# Altium PCB PCBDraft1Stella.PcbDoc
Units mm, origin at the board's own origin, x right, y up, seen from the top; angles counter-clockwise.
Board outline 80.14 x 80.39 mm, 2 copper layers (Top Layer, Bottom Layer); 24 components, 23 nets, 136 pads, 0 vias.
Unrouted connection lines stored in the file: 62.
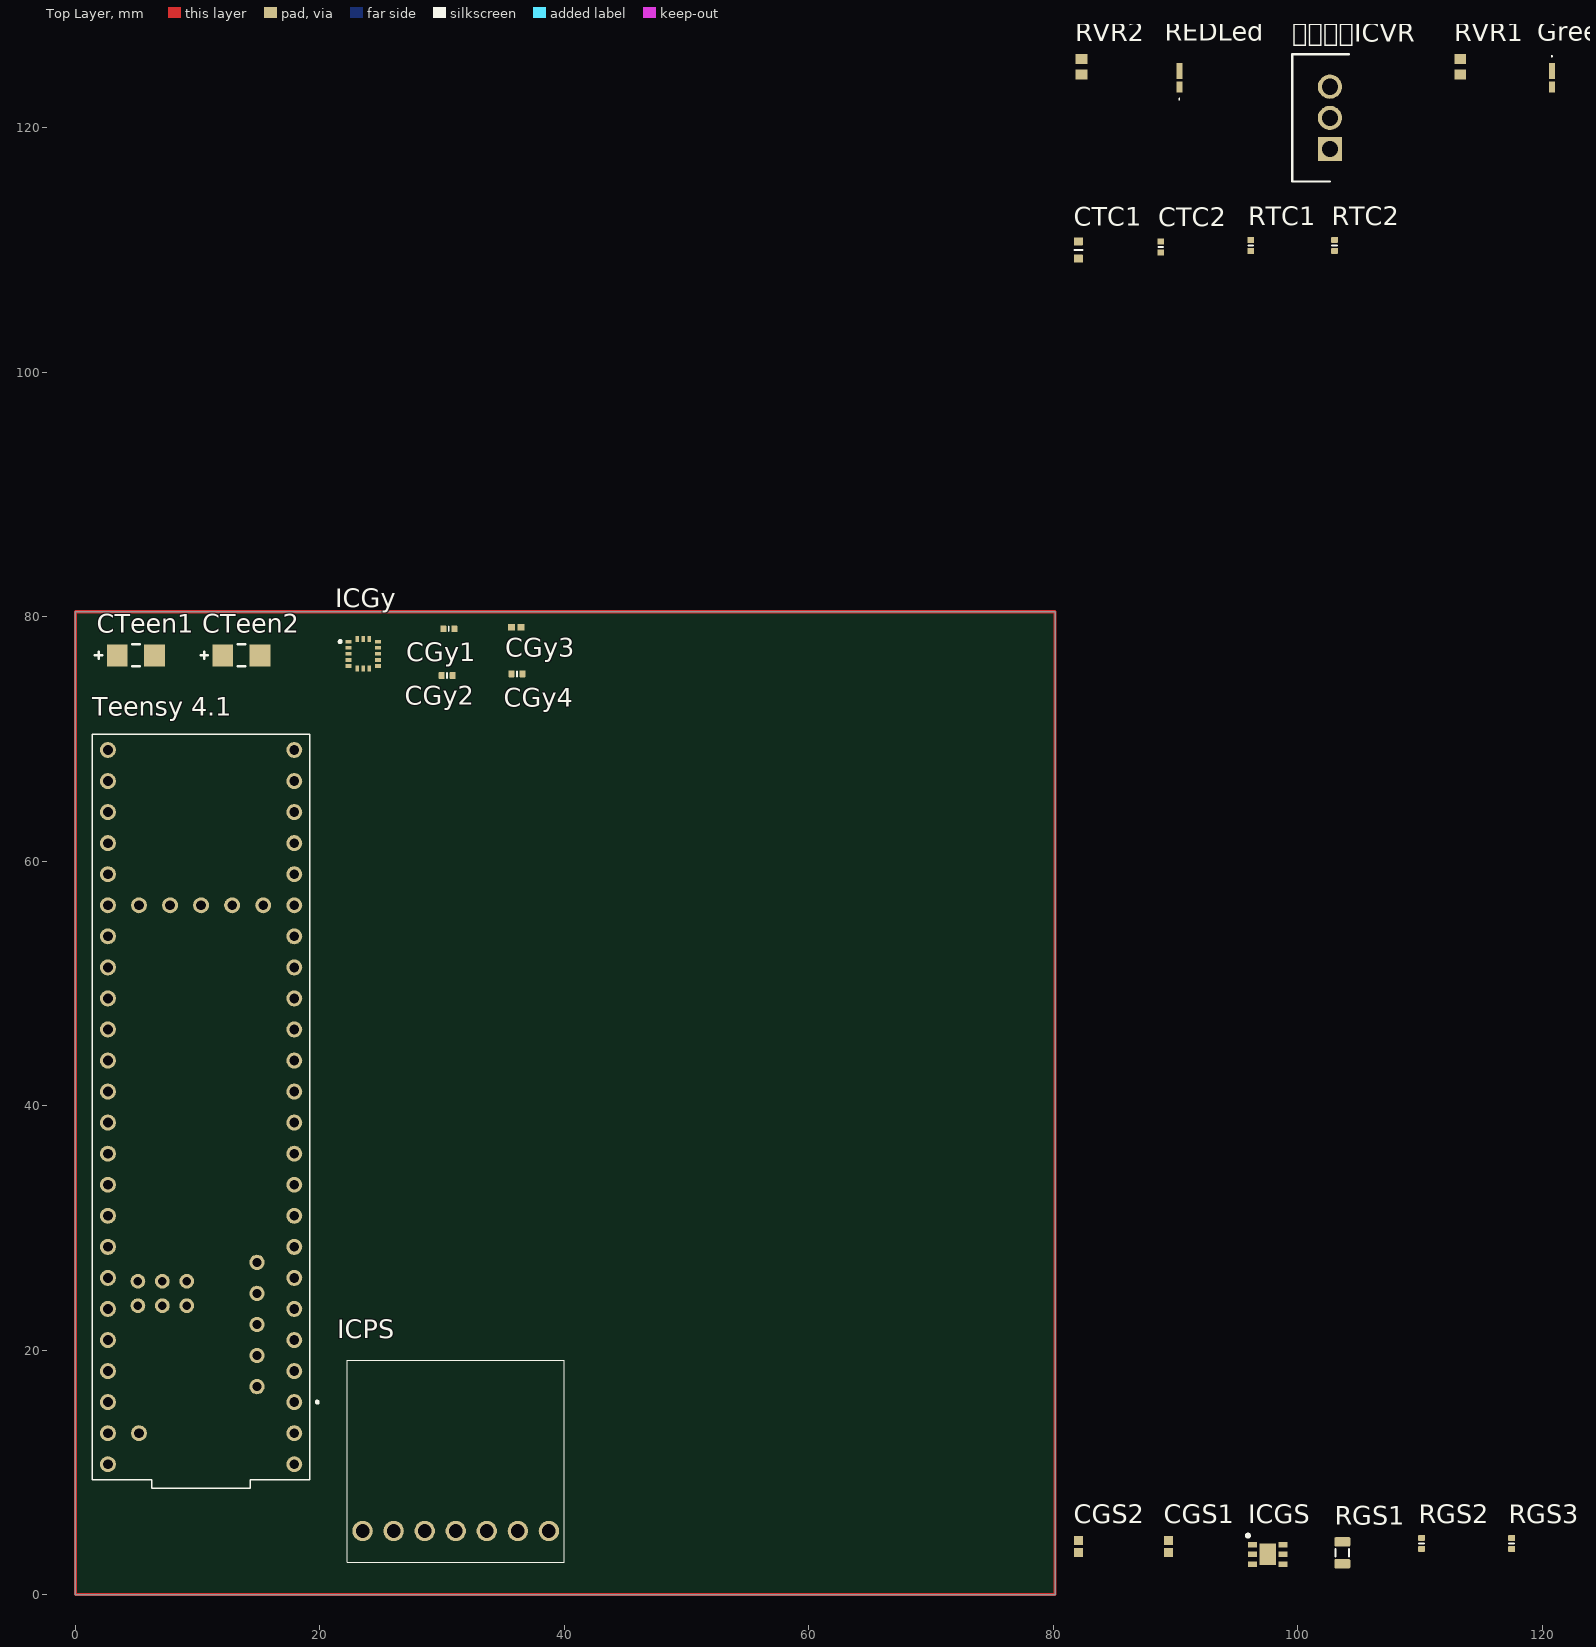
[diagram p0: Top Layer view]
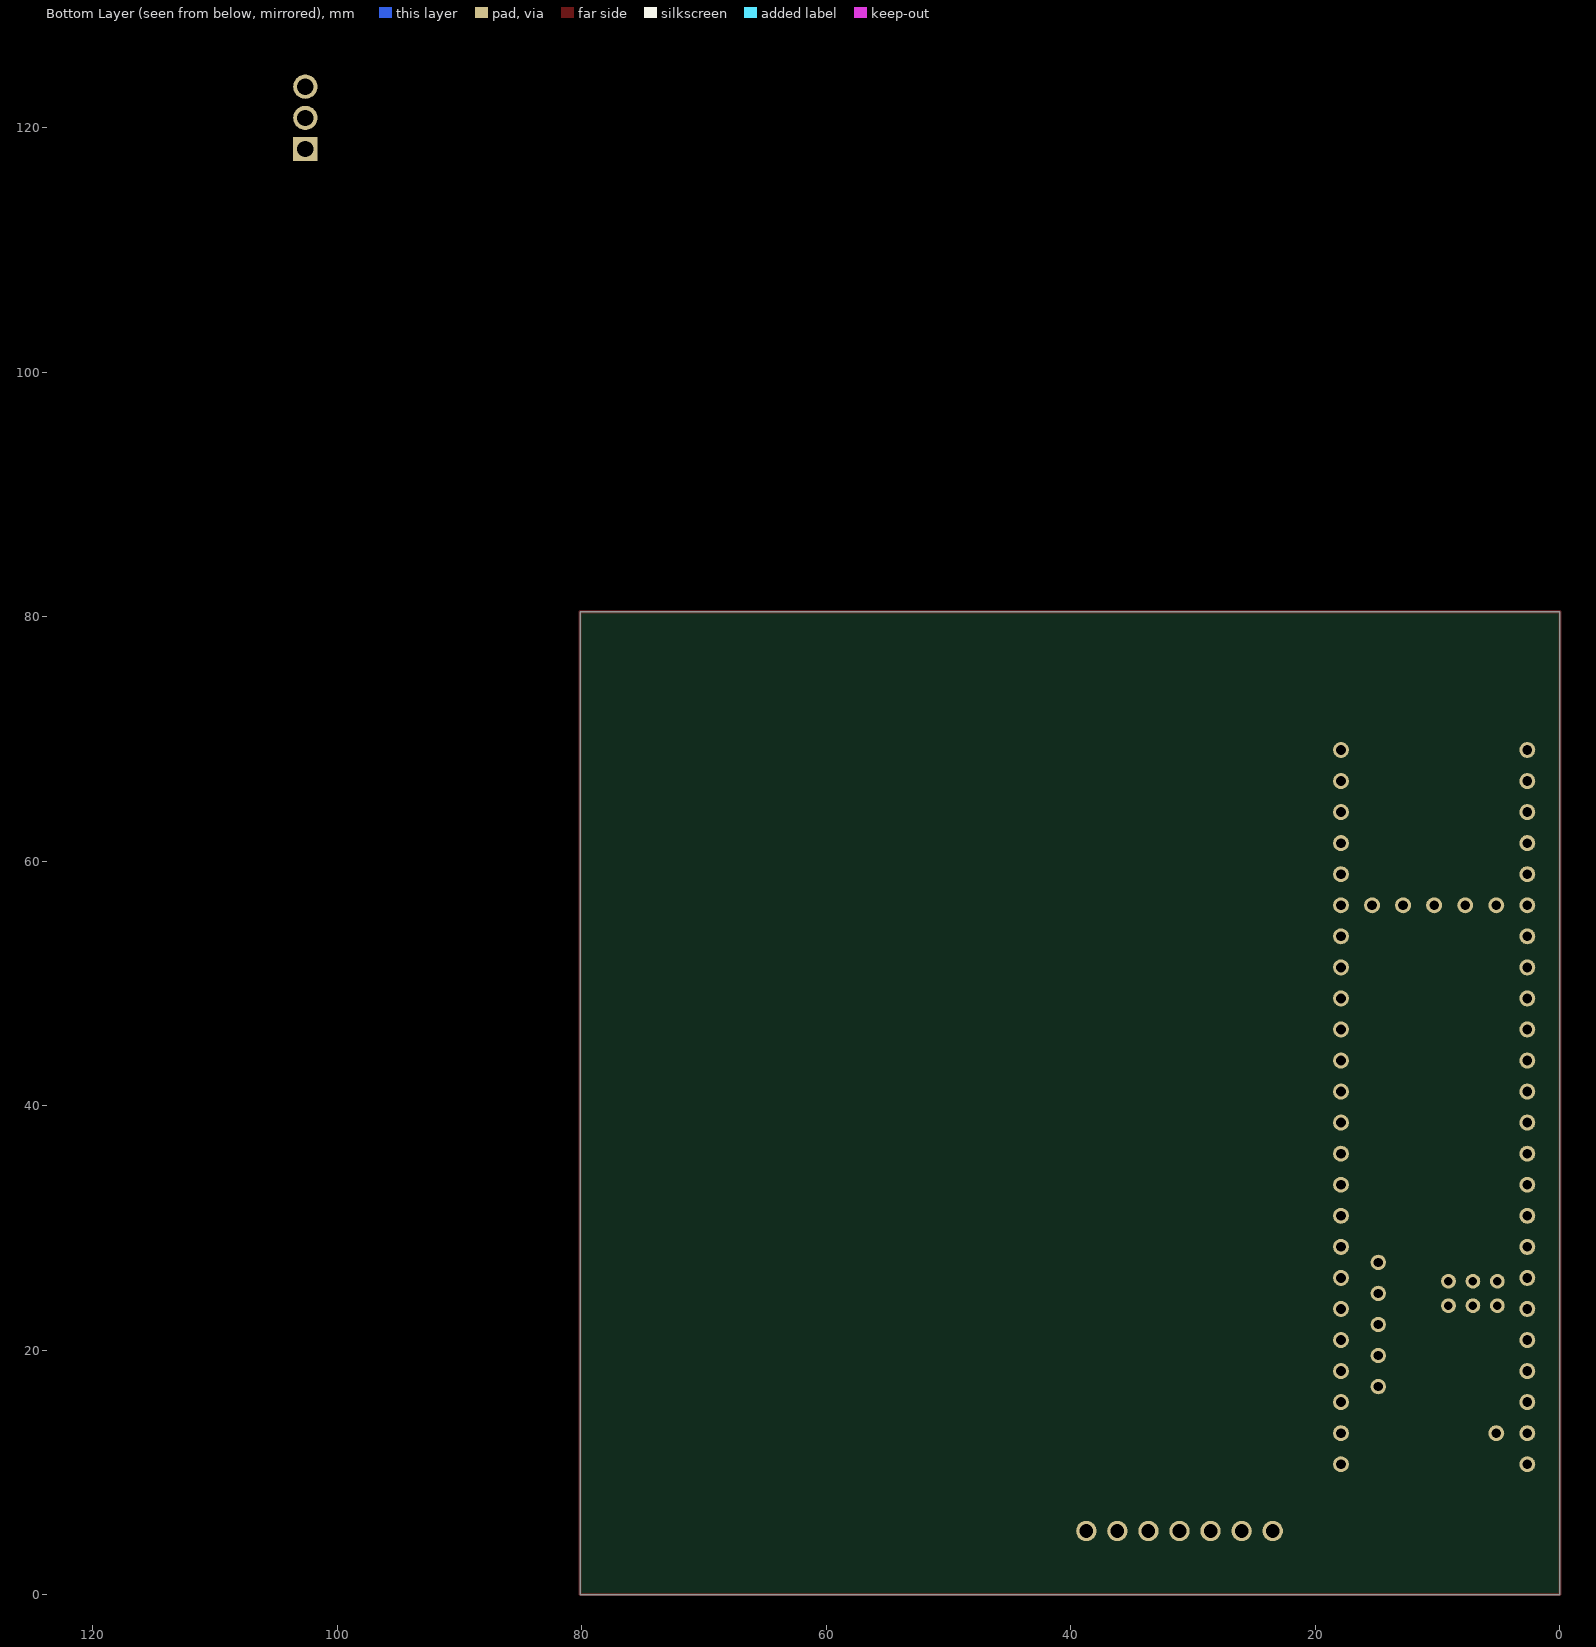
[diagram p1: Bottom Layer view, seen from below]

## Layer stack, top to bottom
Top Solder: solder mask 0.0102, Solder Resist, Dk 3.5
Top Layer: signal copper 0.0356
Dielectric 1: dielectric 0.32, FR-4, Dk 4.8
Bottom Layer: signal copper 0.0356
Bottom Solder: solder mask 0.0102, Solder Resist, Dk 3.5

## Board outline
0,0 0,80.391 80.137,80.391 80.137,0

## Design rules (kind name [scope] priority, off if disabled: settings)
Clearance [All] p1: gap=0.254 ignorepadtopadclearanceinfootprint=FALSE except(0: Arc-Hole Track-Hole SMDPad-Hole THPad-Hole Via-Hole Fill-Hole Poly-Hole Region-Hole Text-Hole)
PolygonConnect [All] p1: connectstyle=Relief reliefconductorwidth=0.254 reliefentries=4 polygonreliefangle="90 Angle" airgapwidth=0.254
RoutingVias [All] p1: holewidth=0.711 width=1.27 viastyle="Through Hole" minholewidth=0.711 minwidth=1.27 maxholewidth=0.711 maxwidth=1.27
SolderMaskExpansion [All] p1: expansion=0.102 istentingtop=FALSE
Width [All] p1: maxlimit=0.254 minlimit=0.254 preferedwidth=0.254
30 further rules are at their usual default settings.

## Classes and differential pairs
component class "Voltage Regulator": ICVR GreenLED REDLed RVR1 RVR2
component class "Thermal camera_1": CTC1 CTC2 RTC1 RTC2
component class "Teensy Schematic": CTeen1 CTeen2 "Teensy 4.1"
component class "Pressure Sensor": ICPS
component class Gyroscope: CGy1 CGy2 CGy3 CGy4 ICGy
component class "Gas sensor": CGS1 CGS2 ICGS RGS1 RGS2 RGS3

## Components (designator, comment, footprint, x,y, rotation, side; value= is the part's Value field where it differs from the comment)
ICVR "L7805ACV" TO255P460X1020X2008-3P 102.616,118.237 r90 top
CGS1 "Capacitor 1 uF +/- 10% 6.3 V 1005" CAPC1005X55X25ML5T10 89.408,3.937 r90 top value=1µF
CGS2 "Capacitor 1 uF +/- 10% 6.3 V 1005" CAPC1005X55X25ML5T10 82.042,3.937 r90 top value=1µF
CGy1 "Capacitor 470nF +/-40% 10V 0402" CAPC0402(1005)60_L 30.549,78.994 r180 top value=470nF
CGy2 "Capacitor 2,2µF +/-20% 10V 0402" CAPC0402(1005)60_L 30.411,75.184 r180 top value=2.2µF
CGy3 "Capacitor 0.1 uF +/- 5% 16 V 0402" CAPC1005X56X25LL10T15 36.068,79.121 r180 top value=100nF
CGy4 "Capacitor 10nF +/-20% 50V 0402" CAPC0402(1005)60_L 36.126,75.311 r180 top value=10nF
CTC1 "Capacitor 10µF +/-20% 10V 0603" CAPC0603(1608)100_L 82.042,109.982 r90 top value=10µF
CTC2 "Capacitor 100nF +/-20% 10V 0402" CAPC0402(1005)60_L 88.773,110.236 r90 top value=100nF
CTeen1 "293D105X0016A2TE3" FP-293DA-MFG 4.953,76.835 r180 top
CTeen2 "293D105X0016A2TE3" FP-293DA-MFG 13.59,76.835 r180 top
GreenLED "ASCKCG00-NW5X5020302" ASCKCG00NW5X5020302 120.777,124.079 r90 top
ICGS "SGP40-D-R4" SON80P244X244X95-7N 97.536,3.302 r0 top
ICGy "IAM-20380" IAM20680HP 23.552,76.954 r0 top
ICPS "3660" 3660 23.495,5.207 r0 top
REDLed "ASCKCR00-BU5V5020402" ASCKCR00BU5V5020402 90.297,124.079 r90 top
RGS1 "Resistor 4R7  +/-5 % 0805 125 mW" RESC0805(2012)_L 103.632,3.429 r90 top value=4.7
RGS2 "Resistor 10K  +/-1 % 0402 63 mW" RESC0402(1005)_L 110.109,4.191 r90 top value=10k
RGS3 "Resistor 10K  +/-1 % 0402 63 mW" RESC0402(1005)_L 117.475,4.191 r90 top value=10k
RTC1 "Resistor 1K +/-5 % 0402 63 mW" RESC0402(1005)_L 96.139,110.363 r90 top value=1k
RTC2 "Resistor 1K +/-5 % 0402 63 mW" RESC0402(1005)_L 102.997,110.363 r90 top value=1k
RVR1 "CRCW0603110RFKEA" RESC1609X50X30NL10T20 113.284,124.968 r90 top
RVR2 "CRCW0603110RFKEA" RESC1609X50X30NL10T20 82.296,124.968 r90 top
"Teensy 4.1" "Teensy 4.1" MODULE_DEV-16771 10.287,39.878 r90 top

## Footprints (in the part's own frame and the unit in brackets; to place one, negate y for a bottom-side part, rotate by r counter-clockwise, add the part's x,y. Pads: shape width x height; smd on the part's side, far side on the other; paste and mask are expansions set on the pad)
3660 [mm]
  round 1.665 hole 1.11: 1(0,0) 2(2.54,0) 3(5.08,0) 4(7.62,0) 5(10.16,0) 6(12.7,0) 7(15.24,0)
  silkscreen extent -1.27,-2.54 16.51,13.97, body extent -1.27,-2.54 16.51,13.97, height 4.1
ASCKCG00NW5X5020302 [mm]
  rect 1.3x0.5 smd: 1(0.55,0)
  rect 0.87x0.5 smd: 2(-0.765,0)
  silkscreen extent 1.7,-0.05 1.8,0.05
ASCKCR00BU5V5020402 [mm]
  rect 0.87x0.5 smd: 1(-0.765,0)
  rect 1.3x0.5 smd: 2(0.55,0)
  silkscreen extent -1.8,-0.05 -1.7,0.05
CAPC0402(1005)60_L [mm] "Chip Capacitor, Body 1.0x0.5mm, Height 0.6mm, IPC High Density"
  rrect25% 0.5x0.55 smd: 1(-0.45,0) 2(0.45,0)
  silkscreen extent 0,-0.2 0,0.2, body extent -0.5,-0.25 0.5,0.25, height 0.6
CAPC0603(1608)100_L [mm] "Chip Capacitor, Body 1.6x0.8mm, Height 1.0mm, IPC High Density"
  rrect25% 0.66x0.76 smd: 1(-0.7,0) 2(0.7,0)
  silkscreen extent 0,-0.3 0,0.3, body extent -0.8,-0.4 0.8,0.4, height 0.95
CAPC1005X55X25ML5T10 [mm] "Chip Capacitor, 2-Leads, Body 1.05x0.55mm, IPC Low Density"
  rect 0.76x0.72 smd: 1(-0.49,0) 2(0.49,0)
  body extent -0.53,-0.28 0.53,0.28, height 0.55
CAPC1005X56X25LL10T15 [mm] "Chip Capacitor, 2-Leads, Body 1.10x0.60mm, IPC High Density"
  rect 0.58x0.54 smd: 1(-0.39,0) 2(0.39,0)
  body extent -0.55,-0.3 0.55,0.3, height 0.56
FP-293DA-MFG [mm]
  rect 1.7x1.8 smd paste+0 mask+0: 1(-1.525,0) 2(1.525,0)
  silkscreen extent -0.3,-0.9 3.35,0.9, body extent -2.47,-1 2.47,1, height 0.25
IAM20680HP [mm]
  rect 0.5x0.3 smd: 1(-1.2,1) 2(-1.2,0.5) 3(-1.2,0) 4(-1.2,-0.5) 5(-1.2,-1) 9(1.2,-1) 10(1.2,-0.5) 11(1.2,0) 12(1.2,0.5) 13(1.2,1)
  rect 0.3x0.5 smd: 6(-0.5,-1.2) 7(0,-1.2) 8(0.5,-1.2) 14(0.5,1.2) 15(0,1.2) 16(-0.5,1.2)
  silkscreen extent -1.99,0.9 -1.79,1.1, body extent -1.5,-1.5 1.5,1.5, height 0.71
MODULE_DEV-16771 [mm]
  round 1.308 hole 0.8: 0(-26.67,-7.62) 1(-24.13,-7.62) 2(-21.59,-7.62) 3(-19.05,-7.62) 3.3V_1(6.35,-7.62) 3.3V_2(-24.13,7.62) 3.3V_3(16.51,-2.54) 4(-16.51,-7.62) 5(-13.97,-7.62) 6(-11.43,-7.62) 7(-8.89,-7.62) 8(-6.35,-7.62) 9(-3.81,-7.62) 10(-1.27,-7.62) 11(1.27,-7.62) 12(3.81,-7.62) 13(3.81,7.62) 14(1.27,7.62) 15(-1.27,7.62) 16(-3.81,7.62) 17(-6.35,7.62) 18(-8.89,7.62) 19(-11.43,7.62) 20(-13.97,7.62) 21(-16.51,7.62) 22(-19.05,7.62) 23(-21.59,7.62) 24(8.89,-7.62) 25(11.43,-7.62) 26(13.97,-7.62) 27(16.51,-7.62) 28(19.05,-7.62) 29(21.59,-7.62) 30(24.13,-7.62) 31(26.67,-7.62) 32(29.21,-7.62) 33(29.21,7.62) 34(26.67,7.62) 35(24.13,7.62) 36(21.59,7.62) 37(19.05,7.62) 38(16.51,7.62) 39(13.97,7.62) 40(11.43,7.62) 41(8.89,7.62) GND1(-29.21,-7.62) GND2(6.35,7.62) GND3(-26.67,7.62) GND4(16.51,0) ON/OFF(16.51,5.08) PROGRAM(16.51,2.54) VBAT(16.51,-5.08) VIN(-29.21,7.62) VUSB(-26.67,5.08)
  round 1.258 hole 0.75: 5V(-22.86,-4.57) D+(-17.78,-4.57) D-(-20.32,-4.57) USB_GND1(-15.24,-4.57) USB_GND2(-12.7,-4.57)
  round 1.208 hole 0.7: GND5(-14.24,3.17) LED(-16.24,3.17) R+(-16.24,5.17) R-(-14.24,5.17) T+(-14.24,1.17) T-(-16.24,1.17)
  silkscreen extent -31.18,-9.6 30.48,8.89, body extent -31.18,-8.89 30.48,8.89, height 7.15
RESC0402(1005)_L [mm] "Chip Resistor, Body 1.0x0.5mm, IPC High Density"
  rrect25% 0.5x0.55 smd: 1(-0.45,0) 2(0.45,0)
  silkscreen extent 0,-0.2 0,0.2, body extent -0.5,-0.25 0.5,0.25, height 0.3
RESC0805(2012)_L [mm] "Chip Resistor, Body 2.0x1.3mm, IPC High Density"
  rrect25% 0.76x1.3 smd: 1(-0.9,0) 2(0.89,0)
  silkscreen extent -0.3,-0.55 0.3,0.55, body extent -1,-0.62 1,0.63, height 0.6
RESC1609X50X30NL10T20 [mm] "Chip Resistor, 2-Leads, Body 1.55x0.85mm, IPC Medium Density"
  rect 0.8x0.95 smd: 1(-0.625,0) 2(0.625,0)
  body extent -0.82,-0.48 0.82,0.48, height 0.5
SON80P244X244X95-7N [mm]
  rect 0.75x0.45 smd: 1(-1.25,0.8) 2(-1.25,0) 3(-1.25,-0.8) 4(1.25,-0.8) 5(1.25,0) 6(1.25,0.8)
  rect 1.35x1.74 smd: 7(0,0)
  silkscreen extent -1.75,1.4 -1.5,1.65, body extent -1.27,-1.22 1.27,1.22, height 0.95
TO255P460X1020X2008-3P [mm]
  rect 1.98x1.98 / inner round 1.98 / far side rect 1.98x1.98 hole 1.32: 1(0,0)
  round 1.98 hole 1.32: 2(2.55,0) 3(5.1,0)
  silkscreen extent -2.65,-1.53 7.75,3.07

## Part data
ICVR: library part CMP-028-000000-1, "Linear voltage regulator,L7805ACV 5V 1A STMicroelectronics L7805ACV, Single Linear Voltage Regulator, 1A 5 V, 2%, 3-Pin TO-220", Manufacturer_Name=STMicroelectronics, Mouser Part Number=511-L7805ACV, Datasheet Link=http://www.st.com/web/en/resource/technical/document/datasheet/CD00000444.pdf, Design Item ID=L7805ACV, Geometry.Height=4.6mm, Manufacturer_Part_Number=L7805ACV, Mouser Price/Stock=https://www.mouser.co.uk/ProductDetail/STMicroelectronics/L7805ACV?qs=xv3lWMc77RdYd2PeLwOwYw%3D%3D, Source=L7805ACV.SchLib
CGS1 CGS2: library part CMP-001-00009-6, "Chip Capacitor, 1 uF, +/- 10%, 6.3 V, 1005 (0402 Metric)", Capacitor Type=Ceramic, Case/Package=0402, Max Operating Temperature=85°C, Min Operating Temperature=-55°C, Tolerance=10%, Voltage Rating=6.3V, Mounting Technology=SM, Pins=2, RoHS Compliant=True
CGy1: library part CMP-001-00060-4, "Chip Capacitor, 470nF +/-40%, 10V, 0402, Thickness 0.6 mm", Case/Package=0402, Max Operating Temperature=85°C, Min Operating Temperature=-55°C, Tolerance=20%, Voltage Rating=10V, Mounting Technology=SMT, Pins=2
CGy2: library part CMP-001-00056-4, "Chip Capacitor, 2,2µF +/-20%, 10V, 0402, Thickness 0.6 mm", Case/Package=0402, Max Operating Temperature=85°C, Min Operating Temperature=-55°C, Tolerance=10%, Voltage Rating=10V, Mounting Technology=SMT, Pins=2
CGy3: library part CMP-001-00001-6, "Chip Capacitor, 0.1 uF, +/- 5%, 16 V, 0402 (1005 Metric)", Capacitor Type=Ceramic, Case/Package=0402, Max Operating Temperature=125°C, Min Operating Temperature=-55°C, Tolerance=5%, Voltage Rating=16V, Mounting Technology=SM, Pins=2, RoHS Compliant=True
CGy4: library part CMP-001-00069-3, "Chip Capacitor, 10nF +/-20%, 50V, 0402, Thickness 0.6 mm", Case/Package=0402, Max Operating Temperature=85°C, Min Operating Temperature=-55°C, Tolerance=5%, Voltage Rating=50V, Mounting Technology=SMT, Pins=2
CTC1: library part CMP-001-00075-4, "Chip Capacitor, 10µF +/-20%, 10V, 0603, Thickness 1 mm", Case/Package=0603, Max Operating Temperature=85°C, Min Operating Temperature=-55°C, Tolerance=10%, Voltage Rating=10V, Mounting Technology=SMT, Pins=2
CTC2: library part CMP-001-00061-3, "Chip Capacitor, 100nF +/-20%, 10V, 0402, Thickness 0.6 mm", Case/Package=0402, Max Operating Temperature=85°C, Min Operating Temperature=-55°C, Tolerance=20%, Voltage Rating=10V, Mounting Technology=SMT, Pins=2
CTeen1 CTeen2: library part CMP-00030-40940187-1, "293D105X0016A2TE3 Surface Mount Tantalum Capacitor, 1 uF, 16 V, ± 20%, -55 °C, 125 °C, 1206 [3216-18 Metric]", Capacitance=1µF, Case Code (Imperial)=1206, Case Code (Metric)=3216, Dielectric Material=Tantalum, ESR (Equivalent Series Resistance)=9.3Ω, Leakage Current=500nA, Max Operating Temperature=125°C, Min Operating Temperature=-55°C, Ripple Current=90mA, Tolerance=20%, Voltage Rating=16V, Case/Package=1206, Depth=1.6mm, Dissipation Factor=4%, Features="General Purpose", Height=1.8mm, Height - Seated (Max)=1.8034mm, Lead Free="Lead Free", Length=3.2mm, Mount="PCB, Surface Mount", NexarPartId=40940187, Number of Pins=2, Packaging="Tape and Reel", Polarity=Polar, Radiation Hardening=No, REACH SVHC=Unknown, RoHS=Compliant, Schedule B="8532210050, 8532210050", Termination=SMD/SMT, Voltage Rating (DC)=16V, Width=1.6002mm
GreenLED: library part CMP-004-00031-1, "Green 524nm LED Indication - Discrete 3.3V 0603 (1608 Metric)", Manufacturer_Name="Avago Technologies", Mouser Part Number=630-ASCKCG00NW5X5020, Datasheet Link=https://docs.broadcom.com/doc/ASCKCx00-xxxxx0x0x02-DS, Design Item ID=ASCKCG00-NW5X5020302, Geometry.Height=0.75mm, Manufacturer_Part_Number=ASCKCG00-NW5X5020302, Mouser Price/Stock=https://www.mouser.co.uk/ProductDetail/Broadcom-Avago/ASCKCG00-NW5X5020302?qs=OcgtsXO%252B3gsRJ%252BJUmBwdbA%3D%3D, Source=ASCKCG00-NW5X5020302.SchLib
ICGS: "Integrated Circuit", Manufacturer_Name=Sensirion, Mouser Part Number=403-SGP40-D-R4, Arrow Part Number=SGP40-D-R4, Arrow Price/Stock=https://www.arrow.com/en/products/sgp40-d-r4/sensirion-ag?region=nac, Datasheet Link=https://www.mouser.com/datasheet/2/682/Sensirion_Gas_Sensors_SGP40_Datasheet-1888696.pdf, Height=0.95mm, Manufacturer_Part_Number=SGP40-D-R4, Mouser Price/Stock=https://www.mouser.co.uk/ProductDetail/Sensirion/SGP40-D-R4?qs=yqaQSyyJnNgaRqiZfsbS1Q%3D%3D
ICGy: "Integrated Circuit", Manufacturer_Name=TDK, Mouser Part Number=410-IAM-20380, Arrow Part Number=IAM-20380, Arrow Price/Stock=https://www.arrow.com/en/products/iam-20380/invensense, Datasheet Link=https://3cfeqx1hf82y3xcoull08ihx-wpengine.netdna-ssl.com/wp-content/uploads/2017/11/DS-000195-IAM-20380_v1.0-Typ.pdf, Height=0.8mm, Manufacturer_Part_Number=IAM-20380, Mouser Price/Stock=https://www.mouser.co.uk/ProductDetail/TDK-InvenSense/IAM-20380?qs=PzGy0jfpSMtUqQt0Uo%252BcYw%3D%3D
ICPS: "Integrated Circuit", Manufacturer_Name=Adafruit, Mouser Part Number=485-3660, Arrow Part Number=3660, Arrow Price/Stock=https://www.arrow.com/en/products/3660/adafruit-industries, Datasheet Link=https://cdn-learn.adafruit.com/downloads/pdf/adafruit-bme680-humidity-temperature-barometic-pressure-voc-gas.pdf, Height=4mm, Manufacturer_Part_Number=3660, Mouser Price/Stock=https://www.mouser.co.uk/ProductDetail/Adafruit/3660?qs=W0yvOO0ixfFypXCClAyRMg%3D%3D
REDLed: library part CMP-004-00032-1, "Red 622nm LED Indication - Discrete 2.1V 0603 (1608 Metric)", Manufacturer_Name="Avago Technologies", Mouser Part Number=630-ASCKCR00BU5V5020, Datasheet Link=https://docs.broadcom.com/doc/ASCKCx00-xxxxx0x0x02-DS, Design Item ID=ASCKCR00-BU5V5020402, Geometry.Height=0.75mm, Manufacturer_Part_Number=ASCKCR00-BU5V5020402, Mouser Price/Stock=https://www.mouser.co.uk/ProductDetail/Broadcom-Avago/ASCKCR00-BU5V5020402?qs=OcgtsXO%252B3gu355%2FiA8jcWA%3D%3D, Source=ASCKCR00-BU5V5020402.SchLib
RGS1: library part CMP-009-00174-3, "Chip Resistor, 4,7 Ohms, +/-5 %, 125 mW, -55 to 155 degC, 0805", Case/Package=0805, Max Operating Temperature=155°C, Min Operating Temperature=-55°C, Power=125mW, Tolerance=5%, Pins=2
RGS2 RGS3: library part CMP-009-00149-3, "Chip Resistor, 10 kOhms, +/-1 %, 63 mW, -55 to 125 degC, 0402", Case/Package=0402, Max Operating Temperature=155°C, Min Operating Temperature=-55°C, Power=63mW, Tolerance=1%, Pins=2
RTC1 RTC2: library part CMP-009-00157-3, "Chip Resistor, 1 kOhms, +/-5 %, 63 mW, -55 to 155 degC, 0402", Case/Package=0402, Max Operating Temperature=155°C, Min Operating Temperature=-55°C, Power=63mW, Tolerance=5%, Pins=2
RVR1 RVR2: library part CMP-2000-03854-1, Manufacturer="Vishay Dale", Part Number=CRCW0603110RFKEA
"Teensy 4.1": library part CMP-003-000000-1, "RT1062 Teensy 4.1 series ARMÂ® CortexÂ®-M7 MPU Embedded Evaluation Board", Package=None, Availability="In Stock", Check_prices=https://www.snapeda.com/parts/DEV-16771/SparkFun+Electronics/view-part/?ref=eda, Component Type=Standard, Design Item ID=DEV-16771, MF="SparkFun Electronics", MP=DEV-16771, Pin Count=65, Price=None, Purchase-URL=https://pricing.snapeda.com/search/part/DEV-16771/?ref=eda, SnapEDA_Link=https://www.snapeda.com/parts/DEV-16771/SparkFun+Electronics/view-part/?ref=snap, Source=DEV-16771.SchLib

## Nets (pads, with @x,y where several pads share a name; then routed paths per layer and width w, separated by ;. In a path a pad name is that pad's centre, name@x,y a point inside that pad or via, vN(x,y) a via of type N, cw(c..) or ccw(c..) an arc to the next point about the centre after c; other vN are vias at no path point)
3.3V: "Teensy 4.1.3.3V_2" CGS2.2 CGy2.1 CGy3.1 CGy4.1 CTC1.1 CTC2.1 CTeen1.2 ICGS.5 ICGy.1 ICGy.16 ICPS.1 ICPS.2 RGS1.2 RGS2.2 RGS3.2 RTC1.2 RTC2.2
+5: "Teensy 4.1.5V" CTeen2.2
GND: ICVR.2 CGS1.1 CGS2.1 CGy1.1 CGy2.2 CGy3.2 CGy4.2 CTC1.2 CTC2.2 CTeen1.1 CTeen2.1 GreenLED.1 ICGS.2 ICGS.4 ICGS.7 ICGy.9 ICGy.10 ICGy.11 ICGy.12 ICGy.13 ICGy.15 ICPS.3 REDLed.1
NetICVR_1: ICVR.1
NetICVR_3: ICVR.3 "Teensy 4.1.VIN" RVR1.1 RVR2.1
NetCGS1_2: CGS1.2 ICGS.1 RGS1.1
NetCGy1_2: CGy1.2 ICGy.14
NetGreenLED_2: GreenLED.2 RVR1.2
NetICGS_3: "Teensy 4.1.25" ICGS.3 RGS2.1
NetICGS_6: "Teensy 4.1.27" ICGS.6 RGS3.1
NetICGy_2: "Teensy 4.1.33" ICGy.2
NetICGy_3: "Teensy 4.1.17" ICGy.3
NetICGy_4: "Teensy 4.1.1" ICGy.4
NetICGy_5: "Teensy 4.1.36" ICGy.5
NetICGy_6: ICGy.6
NetICGy_8: ICGy.8
NetICPS_4: "Teensy 4.1.13" ICPS.4
NetICPS_5: "Teensy 4.1.12" ICPS.5
NetICPS_6: "Teensy 4.1.11" ICPS.6
NetICPS_7: "Teensy 4.1.10" ICPS.7
NetICTC_1: "Teensy 4.1.18" RTC1.1
NetICTC_4: "Teensy 4.1.16" RTC2.1
NetREDLed_2: REDLed.2 RVR2.2
pads on no net: "Teensy 4.1.0" "Teensy 4.1.2" "Teensy 4.1.3" "Teensy 4.1.3.3V_1" "Teensy 4.1.3.3V_3" "Teensy 4.1.4" "Teensy 4.1.5" "Teensy 4.1.6" "Teensy 4.1.7" "Teensy 4.1.8" "Teensy 4.1.9" "Teensy 4.1.14" "Teensy 4.1.15" "Teensy 4.1.19" "Teensy 4.1.20" "Teensy 4.1.21" "Teensy 4.1.22" "Teensy 4.1.23" "Teensy 4.1.24" "Teensy 4.1.26" "Teensy 4.1.28" "Teensy 4.1.29" "Teensy 4.1.30" "Teensy 4.1.31" "Teensy 4.1.32" "Teensy 4.1.34" "Teensy 4.1.35" "Teensy 4.1.37" "Teensy 4.1.38" "Teensy 4.1.39" "Teensy 4.1.40" "Teensy 4.1.41" "Teensy 4.1.D+" "Teensy 4.1.D-" "Teensy 4.1.GND1" "Teensy 4.1.GND2" "Teensy 4.1.GND3" "Teensy 4.1.GND4" "Teensy 4.1.GND5" "Teensy 4.1.LED" "Teensy 4.1.ON/OFF" "Teensy 4.1.PROGRAM" "Teensy 4.1.R+" "Teensy 4.1.R-" "Teensy 4.1.T+" "Teensy 4.1.T-" "Teensy 4.1.USB_GND1" "Teensy 4.1.USB_GND2" "Teensy 4.1.VBAT" "Teensy 4.1.VUSB" ICGy.7
copper on no net: | length 321.1
  Top Layer w0.254: 0,0 80.137,0 80.137,80.391 0,80.391 0,0